# Altium PCB Esp32 with USBC.PcbDoc (part 2 of 2)
Units mil, origin at the board's own origin, x right, y up, seen from the top; angles counter-clockwise.
Board outline 2700 x 1000 mil, 4 copper layers (L1, L2, L3, L4), stack 61.581 mil thick; 64 components, 73 nets, 299 pads, 162 vias.
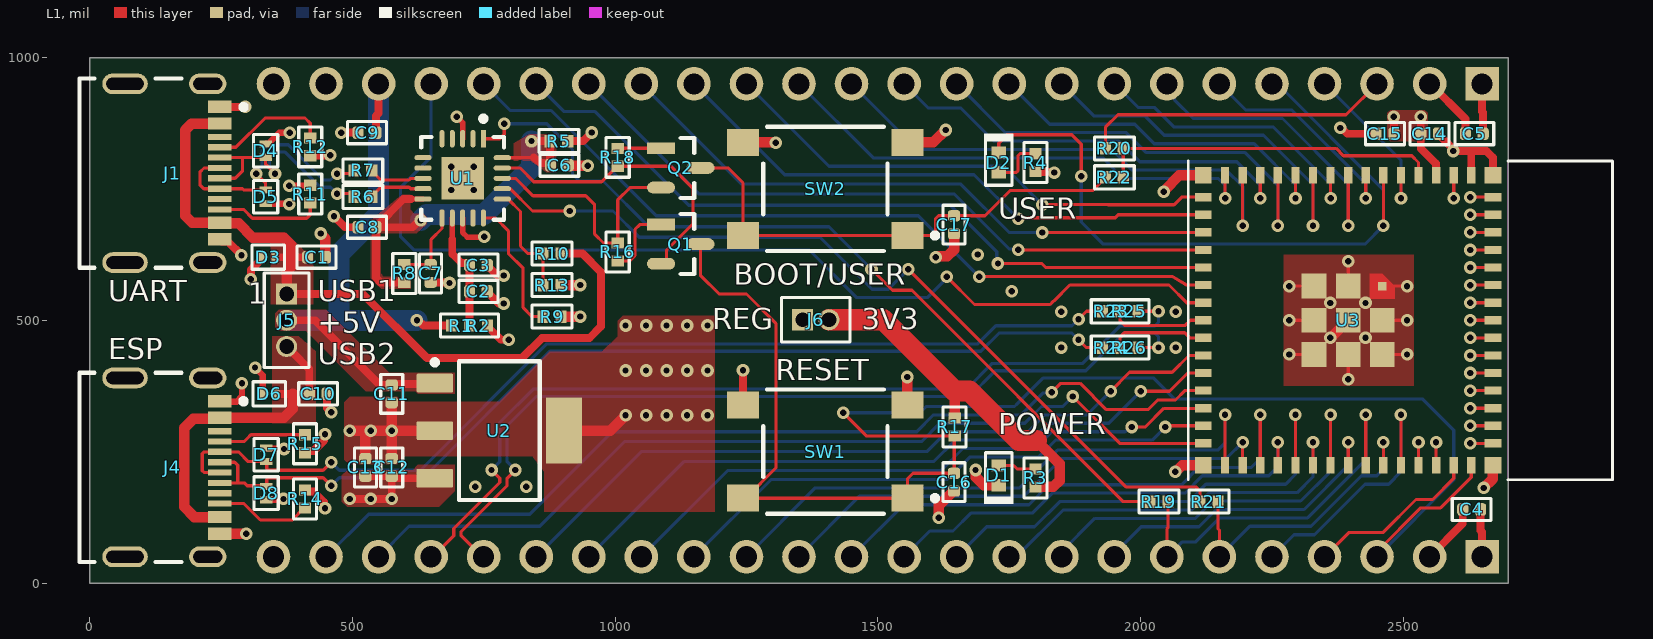
[diagram p0: L1 view]

## Via types
v1: diameter 24, hole 12, L1 to L4, tented both sides, 162 vias

## Nets (pads, with @x,y where several pads share a name; then routed paths per layer and width w, separated by ;. In a path a pad name is that pad's centre, name@x,y a point inside that pad or via, vN(x,y) a via of type N, cw(c..) or ccw(c..) an arc to the next point about the centre after c; other vN are vias at no path point) (continued)
+3V3: (continued)
  L1 w15: R2.1 757,488.82 782.82,463 v1(797.99,463) ; R5.1 939.56,841 955.36,856.8 v1(955.36,857.36) ; R4.2 1801,782 1835,782 v1(1836,781) ; C15.2 2481.93,886.93 v1(2482,887) ; v1(2533,887) 2533.07,886.93 C14.2 2533.07,826.93 2561.99,798.01 2561.99,775.96 U3.3 ; J2.2 2551,950 2618.07,882.93 C5.2 ; C4.2 2646.93,100.07 2650,97 J3.1
  L1 w20: 1641,370 1646,365 R17.2 ; R3.2 1834.01,182.99 1845.72,194.71 1845.72,227.28 1802,271
  L1 w40: J6.2 1510,501 1646,365 1674.43,365 1768.43,271 1802,271
  L2 w20: v1(2482,887) v1(2533,887) ; 2493,822 2560,755 2560,335 2594.31,300.69 2594.31,160.69 2650,105 J3.1
  L2 w40: v1(797.99,463) 857,522.01 857,778 936.36,857.36 1063.64,857.36 1139,782 1405,782 ; J6.2 1407,780 1405,782 ; v1@1835,782 1405,782 ; v1(1836,781) 1845,790 1845,791.4 1875.6,822 2493,822 2509.57,822 2533,845.43 v1(2533,887) 2545.41,899.41 2545.41,945.41 J2.2
+3V3_FTDI: C6.2 C8.2 R5.2 R8.1 U1.10 U1.20 | length 835.8
  L1 w6: U1.20 820.37,809.37 821.37,810 845.29,810
  L1 w10.01: 612,731 612.14,730.86 634.35,730.86 U1.10
  L1 w15: C8.2@545,678.18 597.82,731 612,731 ; R8.1 553.79,571.99 545,580.78 C8.2 614.56,677 627.56,690 v1(630,690) ; v1(841,841) R5.2 876.53,840.46 C6.2@876.53,796.72 ; 845.29,809.37 858.85,799.31 873.94,799.31 C6.2@876.53,796.72 ; C6.2 876.53,795.54 C6.2@876.53,796.72
  L4 w40: v1(630,690) 641,701 751,701 841,791 v1(841,841)
+3V3_REG: C12.2 C13.2 J6.1 U2.3 | length 1246
  L1 w15: v1(495,160) v1(535,160) v1(575,160) C12.2 ; C13.2 C12.2 ; U2.3 579.8,199.45 576.18,203.07 C12.2
  L2 w40: v1(575,160) 575,161 624,210 ; 1312,454 1312,456 J6.1
  L2 w60: 624,210 681,267 1235,267 1312,344 1312,454
+5V: C9.2 C11.2 J2.22 J5.2 R1.1 U2.1 | length 1228.7
  L1 w15: J5.2 429,500 552.07,376.93 C11.2 576.81,378.74 655.16,378.74 U2.1 ; C9.2 545,889 550,894 J2.22 ; v1(623,500) 625.44,500 635.44,490 R1.1
  L4 w40: J5.2 475,500 ; J2.22 550,701 475,626 475,500 ; v1(623,500) 475,500
+5V_VBUS1: C1.2 D3.2 J1.A4B9 J1.B4A9 J5.1 R10.2 | length 1485.7
  L1 w15: D3.2 383.9,620 C1.2 ; J5.1 520,550 642,428 823,428 861,466 951,466 973,488 973,592 938,627 R10.2
  L1 w20: J1.A4B9 194.41,874.41 182,862 182,699 195.57,685.43 J1.B4A9 248.61,684.46 283.54,684.46 310.85,657.15 369.85,657.15 383.9,643.1 383.9,620 383.9,601.9 375,593 J5.1
+5V_VBUS2: C10.2 D6.2 J4.A4B9 J4.B4A9 J5.3 | length 643.2
  L1 w15: D6.2 386.54,360 C10.2 418.07,406.93 386,439 J5.3@374,439
  L1 w20: J4.B4A9 199.41,125.59 180,145 180,295 197.76,312.76 245.83,312.76 J4.A4B9 369.57,314.57 386.54,331.54 386.54,360
+VCC_FTDI: C2.2 C3.2 R1.2 R2.2 U1.12 | length 217.2
  L1 w10.01: 690.32,656.94 U1.12
  L1 w15: 690.23,654.16 690.23,626.44 707.36,609.31 C3.2@719.94,609.31 ; R1.2 C2.2@723.04,554.97 ; C2.2 C3.2
BTN_GPIO0: C17.2 Q2.3 R22.1 SW2.1 SW2.2 | length 944.2
  L1 w6: Q2.3 1215,790 1243.5,761.5 SW2.2 SW2.1 1604.14,661.42 1610,667.28 1610,693.14 1615.86,699 1644.86,699 C17.2 1703.86,698.86 1752,747 1909.17,747 1932.99,770.82 R22.1
CHIP_PU: C16.2 J3.3 Q1.3 R17.1 SW1.1 SW1.2 U3.45 | length 3144.7
  L1 w6: Q1.3 1162.42,585.58 1198,550 1250,550 1306,494 1306,218.99 SW1.2@1248.43,161.42 ; SW1.2 SW1.2@1248.43,161.42 ; v1(1434,324) 1478.08,279.92 R17.1 1645.5,279.42 1645.5,209.36 C16.2 1566.86,208.86 1556.5,198.5 SW1.1 SW1.2@1248.43,161.42 ; J3.3 2450,60 2533,143 2571,143 2629.29,201.29 U3.45
  L4 w6: v1(1434,324) 1580,324 1592,336 1760,336 1764.99,340.98 1814,390 2025,390 2065,350 2537,350 2596,291 2596,196 J3.3
CON1_USB_N: D4.2 J1.A7 J1.B7 R6.1 | length 440.7
  L1 w6.03: J1.A7 277.08,770.08 291.32,784.32 291.32,809.72 ; J1.B7 247.91,809.72 291.32,809.72 ; v1(353,779) 335,797 D4.2 334.72,809.72 291.32,809.72 ; v1(471,741) 496.99,741 R6.1
  L4 w6.03: v1(353,779) 353,780.53 342.01,791.52 342.01,816.47 345.55,820 372.16,820 439.17,752.99 458.48,752.99 470.47,741 v1(471,741)
CON1_USB_P: D5.2 J1.A6 J1.B6 R7.1 | length 495.4
  L1 w6.03: J1.A6 217.76,789.76 210,782 210,758 217.61,750.39 J1.B6 290.61,750.39 293.2,747.8 D5.2 335,760.8 v1@317,778.8 ; v1(471,779) 496.99,779 R7.1
  L4 w6.03: v1(317,779) 317,780.53 327.99,791.52 327.99,822.28 339.74,834.03 377.97,834.03 444.99,767.01 458.48,767.01 470.47,779 v1(471,779)
CON2_USB_N: D7.2 J4.A7 J4.B7 R23.1 | length 1940.4
  L1 w6.03: J4.A7 218.06,210.24 214.53,213.77 214.53,246.07 218.06,249.61 J4.B7 283.39,249.61 301.89,231.11 D7.2 337.11,230 337.11,218.05 340.64,214.51 444.51,214.51 v1(460,230) ; v1(1882,502) 1897,517 R23.1
  L4 w6.03: v1(460,230) 475.49,214.51 629.67,214.51 870.16,455 1690.16,455 1724.67,489.51 1869.51,489.51 v1(1882,502)
CON2_USB_P: D8.2 J4.A6 J4.B6 R24.1 | length 1904.4
  L1 w6.03: J4.B6 282,190.55 ; J4.A6 276.08,229.92 282,224 282,190.55 ; v1(460,185) 444.51,200.49 340.64,200.49 337.11,196.95 337.11,185 D8.2 334.89,185 300,185 294.45,190.55 282,190.55 ; v1(1882,463) 1897,448 R24.1
  L4 w6.03: v1(460,185) 475.49,200.49 635.49,200.49 875.97,440.97 1695.97,440.97 1730.49,475.49 1869.51,475.49 v1(1882,463)
CON_ESP_USB_N: J3.21 R25.1 | length 1716.5
  L1 w6.03: J3.21 652.99,50 692.99,90 692.99,103.83 780.49,191.33 780.49,199.51 v1(765,215) ; R25.1 v1(2034,517)
  L4 w6.03: v1(765,215) 780.49,230.49 780.49,305.49 844.03,369.03 1668.64,369.03 1717.66,418.05 1890.2,418.05 1961.67,489.51 2027.51,489.51 2034,496 v1(2034,517)
CON_ESP_USB_P: J3.20 R26.1 | length 1693.3
  L1 w6.03: J3.20 747.01,50 707.01,90 707.01,98.01 794.51,185.51 794.51,199.51 v1(810,215) ; R26.1 v1(2034.01,448)
  L4 w6.03: v1(810,215) 794.51,230.49 794.51,299.67 849.84,355 1674.45,355 1723.47,404.01 1896.01,404.01 1967.49,475.49 2027.51,475.49 2034.01,468.99 v1(2034.01,448)
CON_GPIO0: J2.3 R20.1 | length 591.4
  L1 w6: R20.1 1932.99,866.99 1957,891 2391,891 J2.3
DTR_FTDI: Q2.2 R16.1 U1.18 | length 477.7
  L1 w6: U1.18 785.64,769.77 810.94,769.77 843.72,737 944,737 961,720 961,664 977.99,647.01 R16.1 1005,729 1028.6,752.6 Q2.2
ESP_USB_N: R23.2 R25.2 U3.23 | length 184.1
  L1 w6.03: R25.2 1961,499 1969.72,490.28 2085.28,490.28 2095,500 U3.23
ESP_USB_P: R24.2 R26.2 U3.24 | length 185.9
  L1 w6.03: R26.2 1960.98,467.98 1969.25,476.25 2083.75,476.25 2093.46,466.54 U3.24
FTDI_RESET: C7.2 R8.2 U1.11 | length 148.1
  L1 w6: R8.2 C7.2 650,606.01 650,654 670.63,674.63 U1.11
FTDI_USB_N: R6.2 U1.9 | length 106.8
  L1 w6.03: R6.2 537.01,736.18 553.81,752.99 608.01,752.99 610.68,750.32 U1.9
FTDI_USB_P: R7.2 U1.8 | length 107
  L1 w6.03: R7.2 537.01,783.82 553.81,767.01 608,767.01 610.99,770 U1.8
GND: C1.1 C2.1 C3.1 C4.1 C5.1 C6.1 C7.1 C8.1 C9.1 C10.1 C11.1 C12.1 C13.1 C14.1 C15.1 C16.1 C17.1 D1.1 D3.1 D4.1 D5.1 D6.1 D7.1 D8.1 J1.A1B12 J1.B1A12 J1.S1 J1.S2 J1.S3 J1.S4 J2.1 J2.23 J3.2 J3.24 J4.A1B12 J4.B1A12 J4.S1 J4.S2 J4.S3 J4.S4 R9.2 R11.1 R12.1 R13.2 R14.1 R15.1 SW1.3 SW1.4 SW2.3 SW2.4 U1.3 U1.13 U1.21 U2.2 U2.4 U3.1 U3.2 U3.42 U3.43 U3.46 U3.47 U3.48 U3.49 U3.50 U3.51 U3.52 U3.53 U3.54 U3.55 U3.56 U3.57 U3.58 U3.59 U3.60 U3.61 U3.62 U3.63 U3.64 U3.65 U3.66 U3.67 U3.68 U3.69 U3.70 U3.71 U3.72 U3.73 | length 4025.2
  L1 w6: v1(2283,435.04) U3.73 ; v1(2283,500) U3.72 ; v1(2283,564.96) U3.71 ; v1(2395.04,387.96) U3.70 ; U3.69 v1(2395.04,612.04) ; U3.68 v1(2507.08,435.04) ; U3.67 v1(2507.08,500) ; U3.66 v1(2507.08,564.96) ; U3.42 v1@2528.9,267.9 ; U3.43 v1@2562.36,267.9 ; v1@2595.83,732.1 U3.2 ; v1(2627.09,265.7) U3.46 ; v1(2627.09,299.16) U3.47 ; v1@2627.14,332.68 U3.48 ; v1(2627.09,366.09) U3.49 ; v1(2627.09,399.56) U3.50 ; v1@2627.14,433.07 U3.51 ; v1(2627.09,466.48) U3.52 ; v1@2627.14,500 U3.53 ; v1@2627.14,533.46 U3.54 ; v1(2627.09,566.88) U3.55 ; v1@2627.14,600.39 U3.56 ; v1@2627.14,633.86 U3.57 ; v1(2627.09,667.27) U3.58 ; v1@2627.14,700.79 U3.59 ; v1@2627.14,734.25 U3.60
  L1 w10.01: v1(699,887) 710,876 U1.3 ; U1.13 710,667 718.98,658.02 750.02,658.02 v1(751,659)
  L1 w12: J4.A1B12 248.7,345 280,345 290,355 v1(290,380) ; v1(315,410) 329.41,395.59 D6.1 ; D5.1 335.56,721.65 379.44,721.65 v1(380,721.09) ; D4.1 335.89,836.48 340.81,836.48 361.19,856.86 v1(380.87,856.86) ; D8.1 367.3,158.3 v1(369,160) ; D7.1 336.89,255.81 369.2,255.81 v1(370,255.01) ; v1(380,756.09) 380.46,756.55 419.54,756.55 R11.1
  L1 w15: J1.B1A12 251.95,649.63 263.37,649.63 v1(289,624) ; J1.A1B12 295.91,905.91 v1(296,906) ; v1(307,578) 307.11,578.11 307.11,596.2 D3.1@326.59,615.69 ; R14.1 413.13,173.88 426.3,173.88 446.28,153.9 446.28,143.72 v1(448,142) ; R15.1 413.13,251.12 426.3,251.12 446.28,271.1 446.28,281.28 v1(448,283) ; R12.1 420.5,813.5 457.5,813.5 v1(458,814) ; C10.1 451.93,333.07 v1(460,325) ; v1(465,698) 486,677 C8.1 ; v1(479,857) C9.1 ; C7.1 649.57,571.57 684.43,571.57 v1(685,571) ; C2.1 756.93,553.82 779.23,531.52 787.52,531.52 v1(788,532) ; C3.1 756.93,604.16 775.09,586 787,586 v1(788,585) ; SW1.4 v1@1243.5,402.5 ; v1(2379.98,866) 2382.42,866 2393.42,855 C15.1 ; J3.2 2613.07,113.07 C4.1@2613.07,138.82 ; C14.1 2566.93,853.82 2595,825.75 v1(2595,822) 2626.5,822 ; U3.1 2629.29,819.21 2626.5,822 ; J2.1 2650,897 2651.93,895.07 C5.1 ; U3.62 2670.63,809.37 2658,822 2626.5,822
  L1 w20: J4.B1A12 297.91,94.09 v1(298,94) ; v1(440,665) 440,663.92 448.93,654.99 448.93,621.81 448.86,621.74 C1.1 ; v1(495,290) v1(535,290) ; C13.1 525,278.92 535,288.92 v1(535,290) ; C12.1 v1(575,290) ; C11.1 v1(575,290) ; U2.2 v1(575,290) ; R9.2 v1(934,507) ; R13.2 v1(934,567) ; U2.4 991,290 v1(1020,319) ; C6.1@910.3,793.19 911.56,794.45 947.57,794.45 v1(948.01,794.01) ; SW2.4 1243.8,838.29 1305.71,838.29 v1(1306,838) ; v1(1556,392.05) 1556,339.08 SW1.3 ; SW2.3 1605.58,838.58 v1(1629,862) ; v1(1610,620) 1611.08,620 1612.85,621.77 1632.2,621.77 1645,634.56 C17.1 ; v1(1616,124) 1616,147.18 1643.19,174.37 1644.37,174.37 C16.1 ; v1(1686,215) 1686.77,214.23 1686.77,201.23 1701.7,186.3 D1.1 ; v1(2044,744.78) 2044.77,745.54 2044.77,746.66 2073.7,775.59 U3.63 ; v1(2066,212) 2067.08,212 2079.49,224.41 U3.64 ; v1(2361,467) 2362.04,467 U3.61 ; v1@2653,181.31 v1(2653,181) 2670,198 2670,223.78 U3.65 ; v1(535,290) v1(575,290)
  other v1: 734,183 831,183 2528.85,267.95 2562.31,267.95 1059,319 1098,319 1137,319 1176,319 2627.09,332.63 1020,404.5 1059,404.5 1098,404.5 1137,404.5 1176,404.5 1243.5,405 2627.09,433.02 1849,448 2067,448 2428,467 1020,490 1059,490 1098,490 1137,490 1176,490 2627.09,499.95 1849,516 2067,516 2361,533 2428,533 2627.09,533.41 1755,555 2627.09,600.34 1690,625 2627.09,633.81 2627.09,700.74 2595.88,732.05 2627.09,734.2 688,748 731,748 688,792 731,792
GPIO0: R20.2 R22.2 U3.4 | length 652.5
  L1 w6: R22.2 R20.2 2372,827 2386,813 2516,813 2528.9,800.1 U3.4
GPIO1: J2.4 U3.5 | length 321.7
  L1 w6: v1@2495.43,732.1 U3.5
  L4 w6: J2.4 2495.48,804.52 v1(2495.48,732.05)
GPIO2: D2.1 J2.5 U3.6 | length 1403.9
  L1 w6: D2.1 1730,837 1746,853 1869,853 1887,835 v1(1887,774) ; v1(2462,680) U3.6
  L4 w6: v1(1887,774) 1887,687 1929,645 2427,645 v1(2462,680) 2462,748.63 2260.63,950 J2.5
GPIO3: J2.6 U3.7 | length 428.4
  L1 w6: v1@2428.5,732.1 U3.7
  L4 w6: J2.6 2200,900 2288,900 2428.56,759.44 v1(2428.56,732.05)
GPIO4: J2.7 U3.8 | length 608.2
  L1 w6: v1@2395.03,679.96 v1(2395.07,680) U3.8@2395.06,775.57
  L4 w6: J2.7 2050,934.31 2064.99,919.31 2064.99,919.01 2100,884 2270,884 2395.07,758.93 v1(2395.07,680)
GPIO5: J2.8 U3.9 | length 560.8
  L1 w6: v1(2361.63,732.05) U3.9
  L4 w6: J2.8 1995,905 2026,905 2063,868 2252,868 2361.63,758.37 v1(2361.63,732.05)
GPIO6: J2.9 U3.10 | length 731.2
  L1 w6: v1(2328.14,680) U3.10
  L4 w6: J2.9 1911,889 2008,889 2045,852 2234,852 2328.14,757.86 v1(2328.14,680)
GPIO7: J2.10 U3.11 | length 693.3
  L1 w6: v1@2294.65,732.1 U3.11
  L4 w6: J2.10 1827,873 1989,873 2026,836 2216,836 2294.7,757.3 v1(2294.7,732.05)
GPIO8: J2.11 U3.12 | length 863.6
  L1 w6: v1(2261.21,680) U3.12
  L4 w6: J2.11 1743,857 1973,857 2011,819 2199,819 2261.21,756.79 v1(2261.21,680)
GPIO9: J2.12 U3.13 | length 826.3
  L1 w6: v1@2227.72,732.1 U3.13
  L4 w6: J2.12 1596,904 1658,904 1721,841 1959,841 1998.22,801.78 2183.22,801.78 2227.77,757.23 v1(2227.77,732.05)
GPIO10: J2.13 U3.14 | length 995.5
  L1 w6: v1(2194.28,680) U3.14
  L4 w6: J2.13 1575,825 1945,825 1984.22,785.78 2163.22,785.78 2194.28,754.72 v1(2194.28,680)
GPIO11: J2.14 U3.15 | length 959.2
  L1 w6: v1(2160.84,732.05) U3.15
  L4 w6: J2.14 1491,809 1928,809 1967.22,769.78 2148,769.78 2160.84,756.94 v1(2160.84,732.05)
GPIO12: J2.15 U3.16 | length 970.8
  L1 w6: v1(1813,720) 1937.72,720 1937.95,719.78 2063.78,719.78 2078.25,734.25 U3.16
  L4 w6: J2.15 1407,793 1740,793 v1(1813,720)
GPIO13: J2.16 U3.17 | length 1079.1
  L1 w6: v1(1767,693) 1769,695 1951.78,695 1957.57,700.79 U3.17
  L4 w6: J2.16 1323,777 1683,777 v1(1767,693)
GPIO14: J2.17 U3.18 | length 1187.8
  L1 w6: v1@1812,667 v1(1813,667) 1813.16,667.16 2119.29,667.16 U3.18
  L4 w6: J2.17 1241,759 1658,759 1750,667 v1(1813,667)
GPIO15: J2.18 U3.19 | length 1300.2
  L1 w6: v1(1767,634) U3.19@2119.31,634
  L4 w6: J2.18 1160,740 1646,740 1750.65,635.35 1765.65,635.35 v1(1767,634)
GPIO16: J2.19 U3.20 | length 1426.2
  L1 w6: v1(1728.57,608) 1812,608 1819.61,600.39 U3.20
  L4 w6: J2.19 903,897 962,897 1140,719 1638,719 1726.43,630.57 1726.43,610.13 v1(1728.57,608)
GPIO17: J2.20 U3.21 | length 1526
  L1 w6: v1(1693,583) 2060.63,583 2062.06,582.13 2087.07,566.93 2089.56,566.93 U3.21
  L4 w6: J2.20 801,899 878.37,899 881.17,896.2 1078.37,699 1577,699 v1(1693,583)
GPIO18: J2.21 U3.22 | length 1956.9
  L1 w6: v1(1631,583) 1684,530 1827.8,530 1829.56,531.76 1829.75,531.95 cw(c1849,516) 1833.85,535.89 1835.86,537.43 1865.44,567 2054,567 2087.54,533.46 U3.22
  L4 w6: J2.21 650,811 592,753 592,659 617,634 1369,634 1460,543 1594,543 v1@1631,580
GPIO21: J3.19 U3.25 | length 1428.1
  L1 w6: v1(1943,365) 1979,401 2060,401 2092.07,433.07 U3.25
  L4 w6: J3.19 1050,250 1593,250 1631,288 1786.12,288 1818.12,320 1898,320 v1(1943,365)
GPIO26: J3.18 U3.26 | length 1314.3
  L1 w6: v1(2000.3,365) 2055,365 2089.61,399.61 U3.26
  L4 w6: J3.18 1131,231 1606,231 1647,272 1792.74,272 1824.75,304 1939.3,304 v1(2000.3,365)
GPIO33: J3.17 U3.28 | length 1186.1
  L1 w6: v1(1983,297) 2009,297 2044.37,332.37 U3.28@2119.15,332.37
  L4 w6: J3.17 1214,214 1620,214 1662,256 1799.37,256 1831.37,288 1970.49,288 1979.49,297 v1(1983,297)
GPIO34: J3.16 U3.29 | length 1072.7
  L1 w6: v1(2047,297) 2049.21,299.21 U3.29
  L4 w6: J3.16 1297,197 1632.65,197 1675.64,240 1806,240 1838,272 2022,272 v1(2047,297)
GPIO35: J3.15 U3.31 | length 1149.3
  L1 w6: U3.31 v1(2160.77,319.98)
  L4 w6: J3.15 1381,181 1769.63,181 1841.63,253 2147,253 2160.77,266.77 v1(2160.77,319.98)
GPIO36: J3.14 U3.32 | length 978
  L1 w6: U3.32 v1@2194.25,267.9
  L4 w6: J3.14 1465,165 1778,165 1850,237 2163.25,237 v1(2194.2,267.95)
GPIO37: J3.13 U3.33 | length 1033.9
  L1 w6: U3.33 v1(2227.69,320)
  L4 w6: J3.13 1549,149 1787.56,149 1825.56,187 2078,187 2111,220 2211,220 2227.69,236.69 v1(2227.69,320)
GPIO38: J3.12 U3.34 | length 872.3
  L1 w6: U3.34 v1@2261.18,267.9
  L4 w6: J3.12 1599,99 1643,99 1677,133 1794.19,133 1832.19,171 2084.63,171 2117.63,204 2244,204 2261.13,221.13 v1(2261.13,267.95)
GPIO39: J3.11 U3.35 | length 918.4
  L1 w6: U3.35 v1(2294.61,320)
  L4 w6: J3.11 1707.13,107.13 1798.13,107.13 1846,155 2091.25,155 2124.25,188 2276,188 2294.61,206.61 v1(2294.61,320)
GPIO40: J3.10 U3.36 | length 750.3
  L1 w6: U3.36 v1(2328.06,267.95)
  L4 w6: J3.10 1763.63,50 1852.63,139 2097.88,139 2130.88,172 2297.86,172 2328.06,202.2 v1(2328.06,267.95)
GPIO41: J3.9 U3.37 | length 787.4
  L1 w6: U3.37 v1@2361.56,319.98
  L4 w6: J3.9 1850,60 1913,123 2104.51,123 2137.51,156 2304.49,156 2361.54,213.05 v1(2361.54,320)
GPIO42: J3.8 U3.38 | length 608.1
  L1 w6: U3.38 v1(2394.99,267.95)
  L4 w6: J3.8 1950,56 2001,107 2111.14,107 2144.14,140 2311.12,140 2394.99,223.87 v1(2394.99,267.95)
GPIO45: J3.5 U3.41 | length 516.4
  L1 w6: U3.41 v1(2495.4,320)
  L4 w6: J3.5 2292,92 2331,92 2427,188 2472,188 2495.4,211.4 v1(2495.4,320)
GPIO46: J3.4 U3.44 | length 332.9
  L1 w6: J3.4 2396,96 2461,96 2524,159 2555.65,159 2595.83,199.17 U3.44
GPIO47: J3.23 U3.27 | length 1841.8
  L1 w6: v1(1831,363) 1848,380 1885,380 1935,330 2014,330 2032.37,348.37 2066.37,348.37 2084.14,366.14 U3.27
  L4 w6: J3.23 531,131 838,131 995,288 1574,288 1606,320 1772.86,320 1814.58,361.72 1829.72,361.72 v1(1831,363)
GPIO48: J3.22 U3.30 | length 1732.8
  L1 w6: v1(1871,355) 1960.25,265.75 U3.30
  L4 w6: J3.22 608,108 857,108 1018,269 1583,269 1618,304 1779.49,304 1811.49,336 1852,336 v1(1871,355)
NetD1_2: D1.2 R3.1 | length 72.8
  L1 w6: D1.2 1758.3,223.7 1764.99,217.01 R3.1
NetD2_2: D2.2 R4.1 | length 101.6
  L1 w6: D2.2 1763.49,781.3 1767,784.81 1767,813.49 1770.51,817.01 R4.1
NetJ1_A5: J1.A5 R12.2 | length 227.6
  L1 w6: J1.A5 278.13,829.13 334,885 410,885 420,875 R12.2
NetJ1_B5: J1.B5 R11.2 | length 204.2
  L1 w6: J1.B5 292.98,711.02 309.91,694.09 413.09,694.09 420,701 R11.2
NetJ4_A5: J4.A5 R15.2 | length 167.6
  L1 w6: J4.A5 294.29,269.29 300,275 307.01,282.01 R15.2
NetJ4_B5: J4.B5 R14.2 | length 184.8
  L1 w6: J4.B5 293.82,151.18 325,120 385.83,120 408.82,142.99 R14.2
NetQ1_1: Q1.1 R16.2 | length 140.6
  L1 w6: R16.2 1027.99,612.99 1038,623 1038,673 1046.98,681.98 1087.16,681.98 Q1.1
NetQ2_1: Q2.1 R18.2 | length 82.7
  L1 w6: R18.2 1005.2,827.2 1087.38,827.2 Q2.1
NetR9_1: R9.1 U1.15 | length 260.5
  L1 w6: U1.15 772.41,694.59 797,670 797,667 797,627 825,599 825,524 842,507 R9.1
RTS_FTDI: Q1.2 R18.1 U1.19 | length 574
  L1 w6: U1.19 819.32,789.68 845.32,763.68 974.51,763.68 1003.82,792.99 1106.01,792.99 1148,751 1148,683.17 1098,633.17 1098,613.38 1092.21,607.6 Q1.2
RXD_FTDI: R19.2 U1.1 | length 1617.6
  L1 w6: U1.1 780.61,845.41 789,853.8 v1(789,874) ; v1(1488,597) 1528,557 1565,557 1967,155 R19.2
  L4 w6: v1(789,874) 827,874 870,874 919,825 919,778 932,765 977,765 1064,678 1407,678 v1(1488,597)
TXD_FTDI: R21.2 U1.17 | length 1617.4
  L1 w6: U1.17 800.68,750.32 843,708 v1(914,708) ; v1(1558,597) 1972,183 2105,183 2112.99,175.01 R21.2
  L4 w6: v1(914,708) 996,708 1046,658 1390,658 1489,559 1520,559 v1(1558,597)
U0RXD: J3.6 R21.1 U3.40 | length 582.1
  L1 w6: R21.1 2147.01,103.99 2150,101 J3.6 ; U3.40 v1@2461.97,267.9
  L4 w6: J3.6 2208,108 2324.37,108 2420.37,204 2449.5,204 2461.92,216.42 v1(2461.92,267.95)
U0TXD: J3.7 R19.1 U3.39 | length 741.3
  L1 w6: J3.7 2050,103 2052.01,105.01 R19.1 ; U3.39 v1(2428.47,320)
  L4 w6: J3.7@2050.6,49.4 2079.59,78.39 2105.16,78.39 2150.76,124 2317.75,124 2428.47,234.73 v1(2428.47,320)
VBUS_SENSE: R10.1 R13.1 U1.16 | length 219.4
  L1 w6: U1.16 796.72,730.63 796.94,730.4 796.94,730.06 820,707 820,656 820,641 834,627 R10.1 R13.1
pads on no net: J1.A8 J1.B8 J2.24 J4.A8 J4.B8 U1.2 U1.4 U1.5 U1.6 U1.7 U1.14

## Polygon pours and split planes (outlines as drawn)
+3V3_FTDI on L1 "+3V3_FTDI_L01_P004" (solid, pour order 4): 611,560 555,560 535,580 535,680 535,690 593.8,739 610,739 610,711 618,703 636,703 642,697 642,682.41 623,666 554,666 554,589 560,583 611,583
GND on L1 "GND_L01_P013" (solid, pour order 13): 1190,509 1015,509 1005,499 1005,470 975,440 875,440 780,345 595,345 586,354 495,354 485,344 485,235 494,226 586,226 595,241 842,241 865,212 865,136 1190,136
GND on L1 "GND_L01_P011" (solid, pour order 11): 2272,625 2520,625 2520,375 2272,375
+5V_VBUS2 on L1 "+5V_VBUS2_L01_P010" (solid, pour order 10): 348,470 398,470 430,441 430,304 348,304
+5V_VBUS1 on L1 "+5V_VBUS1_L01_P008" (solid, pour order 8): 345,530 345,667 374,667 409,632 426,632 426,530
+5V on L1 "+5V_L01_P007" (solid, pour order 7): 695,400 570,400 450,520 360,520 353,513 353,487 360,480 411,480 526,365 620,365 625,360 695,360
+3V3_REG on L1 "+3V3_REG_L01_P005" (solid, pour order 5): 695,225 695,175 665,145 490,145 480,155 480,205 490,215 615,215 625,225
+3V3_FTDI on L1 "+3V3_FTDI_L01_P001" (solid, pour order 1): 836,854 888,854 888,782 869,782 839,804 807,804 807,837.08
+3V3 on L1 "+3V3_L01_P000" (solid, pour order 0): 2469.75,846.25 2475,841 2541,841 2546,846 2546,895 2541,900 2474.75,900 2469.75,895
GND on L2 "GND_L02_P016" (solid, pour order 16): 0,0 0,1000 2700,1000 2700,0
+3V3_REG on L2 "+3V3_REG_L02_P015" (solid, pour order 15): 483,215 660,215 660,140 483,140
+3V3 on L2 "+3V3_L02_P014" (solid, pour order 14): 2680,20 2680,985 930,985 930,820 1055,820 1175,700 1300,700 1387,603 1387,481 1440,481 1440,665 1515,740 1915,740 1950,775 2495,775 2525,745 2525,220 2485,180 2350,180 2300,130 2300,20
GND on L3 (split plane): 2699.95,0.05 0.05,0.05 0.05,999.95 2699.95,999.95

## Silkscreen, mask and mechanical layers (free items; w line width, h text height)
Top Overlay:
  text "USER" at 1729,693 h40
  text "BOOT/USER" at 1226,568 h40
  text "UART" at 36,536 h40
  text "USB1" at 434,536 h40
  text "REG" at 1185,483 h40
  text "3V3" at 1469,483 h40
  text "+5V" at 434,476 h40
  text "ESP" at 36,426 h40
  text "USB2" at 434,416 h40
  text "RESET" at 1306,386 h40
  text "POWER" at 1729,283 h40
Bottom Overlay:
  text "IO18" at 669,874 h40 r90
  text "IO17" at 769,874 h40 r90
  text "IO16" at 869,874 h40 r90
  text "IO15" at 969,874 h40 r90
  text "IO14" at 1069,874 h40 r90
  text "IO13" at 1169,874 h40 r90
  text "IO12" at 1269,874 h40 r90
  text "IO10" at 1469,874 h40 r90
  text "IO11" at 1369,860.67 h40 r90
  text "GND" at 469,847.34 h40 r90
  text "3V3" at 2569,847.34 h40 r90
  text "GND" at 2669,847.34 h40 r90
  text "IO9" at 1569,840.68 h40 r90
  text "IO8" at 1669,840.68 h40 r90
  text "IO7" at 1769,840.68 h40 r90
  text "IO6" at 1869,840.68 h40 r90
  text "IO5" at 1969,840.68 h40 r90
  text "IO4" at 2069,840.68 h40 r90
  text "IO3" at 2169,840.68 h40 r90
  text "IO2" at 2269,840.68 h40 r90
  text "IO0" at 2469,840.68 h40 r90
  text "IO1" at 2369,827.35 h40 r90
  text "NC" at 369,807.35 h40 r90
  text "5V" at 569,807.35 h40 r90
  text "Duc Anh" at 2150,470 h70
  text "RXD" at 2165.75,282.89 h40 r90
  text "TXD" at 2072.06,281.88 h40 r90
  text "GND" at 369,279 h40 r90
  text "IO47" at 469,279 h40 r90
  text "IO48" at 569,279 h40 r90
  text "USB-" at 669,279 h40 r90
  text "USB+" at 769,279 h40 r90
  text "IO21" at 869,279 h40 r90
  text "IO26" at 969,279 h40 r90
  text "IO33" at 1069,279 h40 r90
  text "IO34" at 1169,279 h40 r90
  text "IO35" at 1269,279 h40 r90
  text "IO36" at 1369,279 h40 r90
  text "IO37" at 1469,279 h40 r90
  text "IO38" at 1569,279 h40 r90
  text "IO39" at 1669,279 h40 r90
  text "IO40" at 1769,279 h40 r90
  text "IO41" at 1869,279 h40 r90
  text "IO42" at 1969,279 h40 r90
  text "IO45" at 2269,279 h40 r90
  text "IO46" at 2369,279 h40 r90
  text "EN" at 2469,279 h40 r90
  text "GND" at 2569,279 h40 r90
  text "3V3" at 2669,279 h40 r90
Board Shape:
  the board outline again, w20

## Text inside footprints (layer, text, board x,y; h text height)
J2: Bottom Overlay "1" at 2637.52,1027.91 h40 r270
J3: Bottom Overlay "1" at 2627,-34 h40 r270
J5: Top Overlay "1" at 301,531 h40